# EAGLE board unoedge_conectoresad724 (EAGLE 6.5.0)
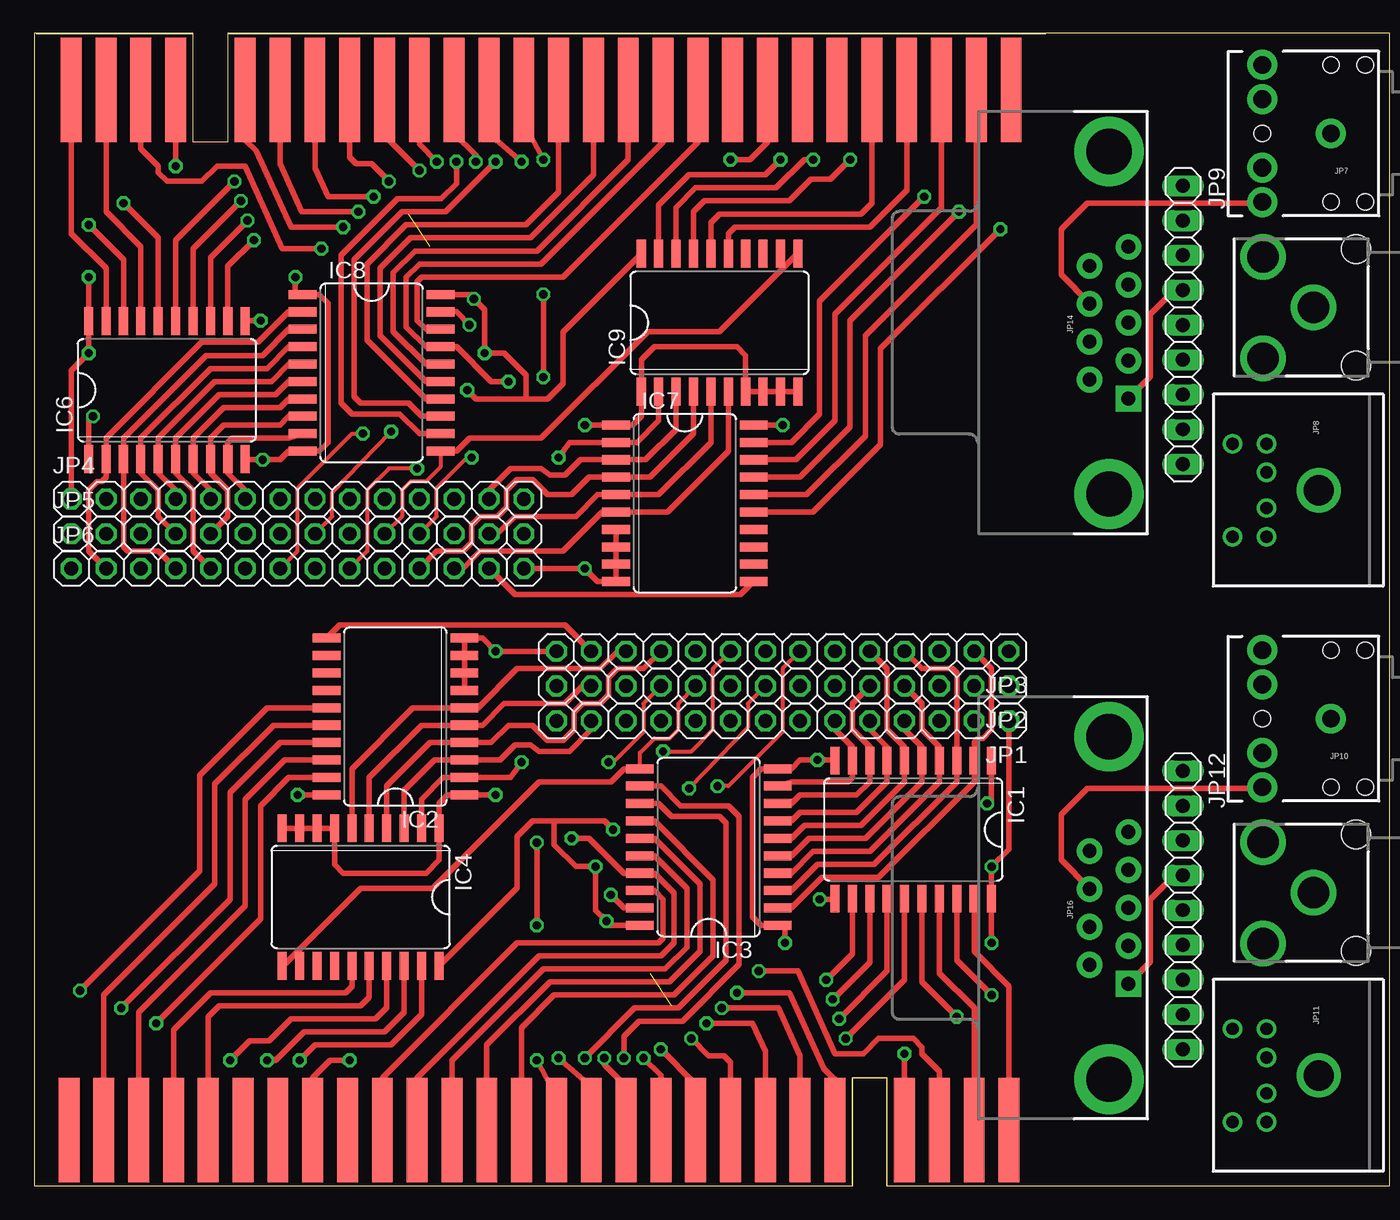
[diagram p0: board, top side]
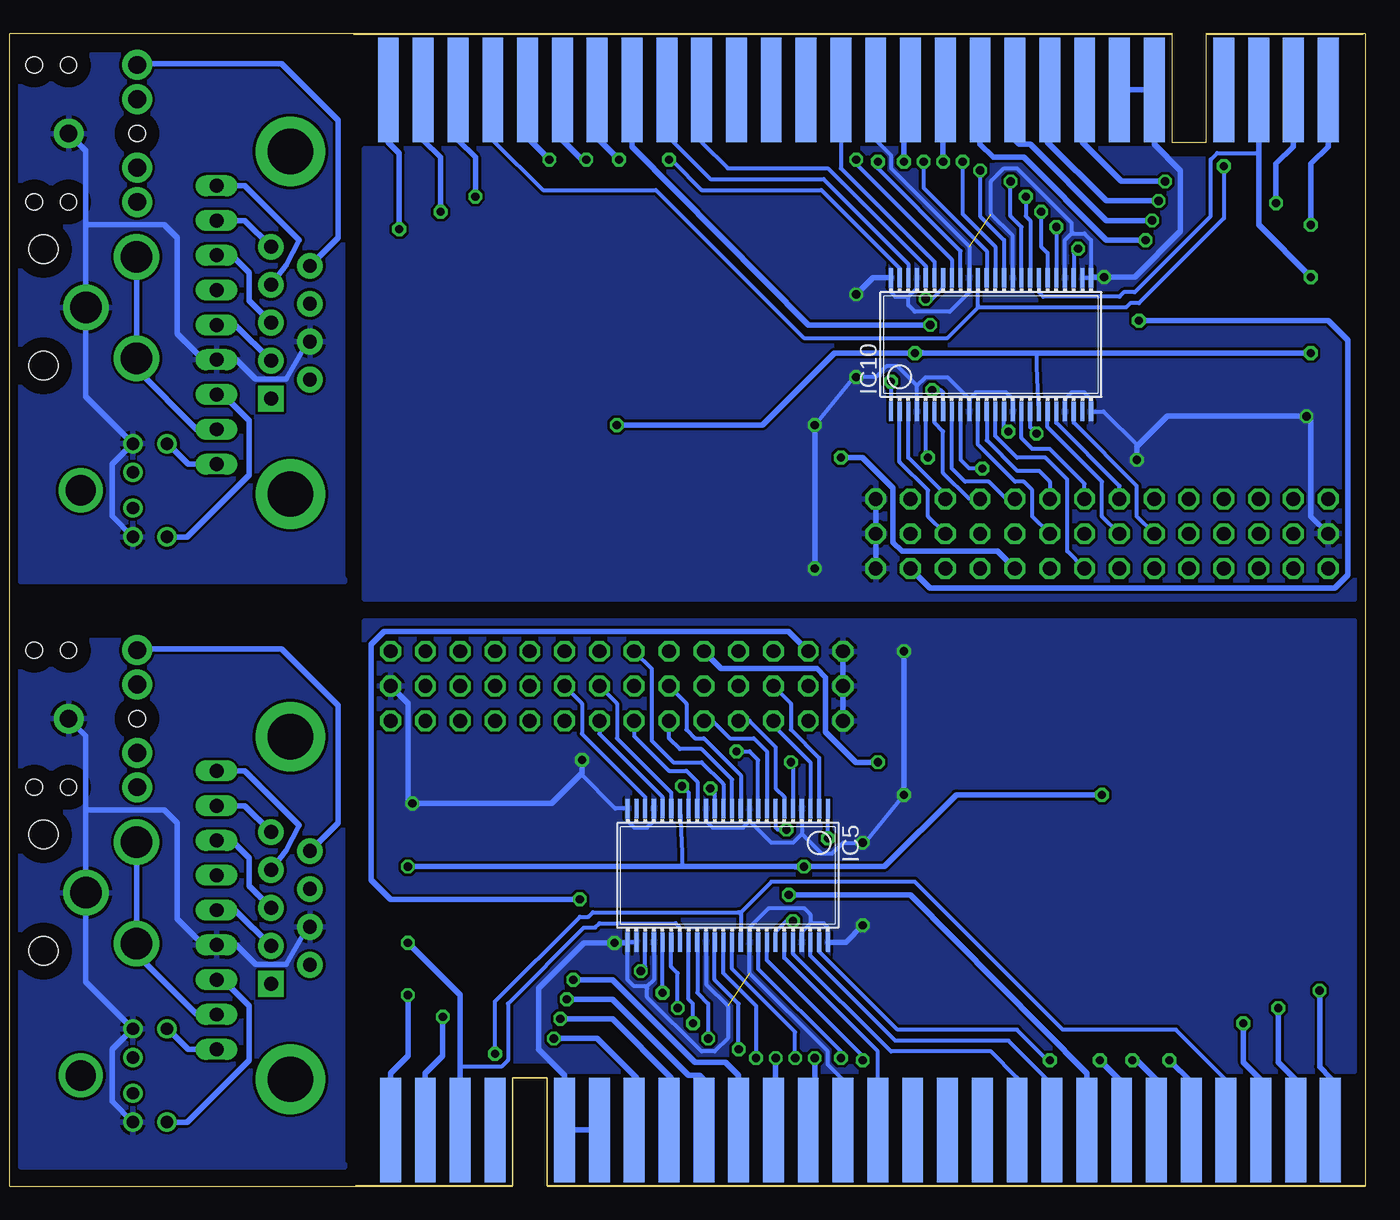
[diagram p1: board, bottom side, seen from below]

Size 73.82 x 84.01 mm. Coordinates in mm from the lower left corner, seen from the top.
Copper layers (1*16): Top 0.035mm / dielectric 1.5mm / Bottom 0.035mm
Design rules "default": minimum track width 10mil, minimum drill 24mil, track to track 8mil, track to pad 8mil, pad to pad 8mil, via to via 8mil, smd to smd 8mil, copper to edge 40mil, drill to drill 8mil, minimum pad ring 10mil, minimum via ring 8mil, stop-mask expansion 4mil, vias tented up to drill 0mil, thermal gap 10mil
Milling: 12 lines

## Footprints (pad centres in the part's own frame; a part is rotated, then mirrored left to right if it is on the bottom)
SO20W = smd 0.66 x 2.032: 1 -5.715,-5.029; 2 -4.445,-5.029; 3 -3.175,-5.029; 4 -1.905,-5.029; 5 -0.635,-5.029; 6 0.635,-5.029; 7 1.905,-5.029; 8 3.175,-5.029; 9 4.445,-5.029; 10 5.715,-5.029; 11 5.715,5.029; 12 4.445,5.029; 13 3.175,5.029; 14 1.905,5.029; 15 0.635,5.029; 16 -0.635,5.029; 17 -1.905,5.029; 18 -3.175,5.029; 19 -4.445,5.029; 20 -5.715,5.029
SSOP48DL = smd 0.305 x 1.422: 1 -6.985,-4.877; 2 -6.35,-4.877; 3 -5.715,-4.877; 4 -5.08,-4.877; 5 -4.445,-4.877; 6 -3.81,-4.877; 7 -3.175,-4.877; 8 -2.54,-4.877; 9 -1.905,-4.877; 10 -1.27,-4.877; 11 -0.635,-4.877; 12 0,-4.877; 13 0.635,-4.877; 14 1.27,-4.877; 15 1.905,-4.877; 16 2.54,-4.877; 17 3.175,-4.877; 18 3.81,-4.877; 19 4.445,-4.877; 20 5.08,-4.877; 21 5.715,-4.877; 22 6.35,-4.877; 23 6.985,-4.877; 24 7.62,-4.877; 25 7.62,4.877; 26 6.985,4.877; 27 6.35,4.877; 28 5.715,4.877; 29 5.08,4.877; 30 4.445,4.877; 31 3.81,4.877; 32 3.175,4.877; 33 2.54,4.877; 34 1.905,4.877; 35 1.27,4.877; 36 0.635,4.877; 37 0,4.877; 38 -0.635,4.877; 39 -1.27,4.877; 40 -1.905,4.877; 41 -2.54,4.877; 42 -3.175,4.877; 43 -3.81,4.877; 44 -4.445,4.877; 45 -5.08,4.877; 46 -5.715,4.877; 47 -6.35,4.877; 48 -6.985,4.877
1X14 = drill 1.016 octagon: 1 -16.51,0; 2 -13.97,0; 3 -11.43,0; 4 -8.89,0; 5 -6.35,0; 6 -3.81,0; 7 -1.27,0; 8 1.27,0; 9 3.81,0; 10 6.35,0; 11 8.89,0; 12 11.43,0; 13 13.97,0; 14 16.51,0
AUDIO-JACK = drill 1.3 pad 2.184: RING 5,5; RSH 5,2.5; SLEEVE 0,0; TIP 5,-5; TSH 5,-2.5 | hole 1.2: 0,5; -2.5,5; -2.5,-5; 0,-5; 5,0
MINI-DIN6 = drill 0.9: 1 -1.3,-8.5; 2 1.3,-8.5; 3 -3.4,-8.5; 4 3.4,-8.5; 5 -3.4,-11; 6 3.4,-11 | drill 2.2: P$1 0,-4.7
1X09 = drill 1.016 long: 1 -10.16,0; 2 -7.62,0; 3 -5.08,0; 4 -2.54,0; 5 0,0; 6 2.54,0; 7 5.08,0; 8 7.62,0; 9 10.16,0
RCA = drill 2.3: PIN 3.7,3.7; SHELL 0,0; SWITCH 3.7,-3.7 | hole 2.1: -3.1,4.25; -3.1,-4.25
DB9_MALE = drill 1.016 pad 1.88: 1 5.54,-1.42; 2 2.77,-1.42; 3 0,-1.42; 4 -2.77,-1.42; 6 4.15,1.42; 7 1.38,1.42; 8 -1.38,1.42; 9 -4.15,1.42 | drill 1.016 pad 1.88 square: 5 -5.54,-1.42 | drill 3.302 pad 5.08: G1 -12.5,0; G2 12.5,0
CONECTOR_LADO_SPECTRUM = smd 7.62 x 1.524: P$1 2.54,2.54; P$2 2.54,0; P$3 2.54,-2.54; P$4 2.54,-5.08; P$5 2.54,-10.16; P$6 2.54,-12.7; P$7 2.54,-15.24; P$8 2.54,-17.78; P$9 2.54,-20.32; P$10 2.54,-22.86; P$11 2.54,-25.4; P$12 2.54,-27.94; P$13 2.54,-30.48; P$14 2.54,-33.02; P$15 2.54,-35.56; P$16 2.54,-38.1; P$17 2.54,-40.64; P$18 2.54,-43.18; P$19 2.54,-45.72; P$20 2.54,-48.26; P$21 2.54,-50.8; P$22 2.54,-53.34; P$23 2.54,-55.88; P$24 2.54,-58.42; P$25 2.54,-60.96; P$26 2.54,-63.5; P$27 2.54,-66.04 | smd 7.62 x 1.524 bottom: P$28 2.54,2.54; P$29 2.54,0; P$30 2.54,-2.54; P$31 2.54,-5.08; P$32 2.54,-10.16; P$33 2.54,-12.7; P$34 2.54,-15.24; P$35 2.54,-17.78; P$36 2.54,-20.32; P$37 2.54,-22.86; P$38 2.54,-25.4; P$39 2.54,-27.94; P$40 2.54,-30.48; P$41 2.54,-33.02; P$42 2.54,-35.56; P$43 2.54,-38.1; P$44 2.54,-40.64; P$45 2.54,-43.18; P$46 2.54,-45.72; P$47 2.54,-48.26; P$48 2.54,-50.8; P$49 2.54,-53.34; P$50 2.54,-55.88; P$51 2.54,-58.42; P$52 2.54,-60.96; P$53 2.54,-63.5; P$54 2.54,-66.04

## Placement (x,y rotation side)
IC1  74HC574D  [SO20W]  64.14,25.97 180 top
IC2  74HC574D  [SO20W]  26.35,34.23 90 top
IC3  74HC574D  [SO20W]  49.21,24.7 90 top
IC4  74HC574D  [SO20W]  23.81,21.05 180 top
IC5  74AC16245  [SSOP48DL]  46.2,22.64 180 bottom
IC6  74HC574D  [SO20W]  9.68,58.04 0 top
IC7  74HC574D  [SO20W]  47.47,49.78 270 top
IC8  74HC574D  [SO20W]  24.61,59.31 270 top
IC9  74HC574D  [SO20W]  50.01,62.96 0 top
IC10  74AC16245  [SSOP48DL]  27.62,61.37 0 bottom
JP1  fila1  [1X14]  54.61,33.91 180 top
JP2  fila2  [1X14]  54.61,36.45 180 top
JP3  fila3  [1X14]  54.61,38.99 180 top
JP4  fila1  [1X14]  19.21,50.1 0 top
JP5  fila2  [1X14]  19.21,47.56 0 top
JP6  fila3  [1X14]  19.21,45.02 0 top
JP7  [AUDIO-JACK]  94.61,76.77 180 top  (outside the outline)
JP8  MINI-DIN6PTH  [MINI-DIN6]  98.42,50.74 270 top  (outside the outline)
JP9  [1X09]  83.82,62.8 270 top  (outside the outline)
JP10  [AUDIO-JACK]  94.61,34.07 180 top  (outside the outline)
JP11  MINI-DIN6PTH  [MINI-DIN6]  98.42,8.03 270 top  (outside the outline)
JP12  [1X09]  83.82,20.1 270 top  (outside the outline)
JP13  RCA  [RCA]  93.34,64.07 180 top  (outside the outline)
JP14  [DB9_MALE]  78.42,62.96 90 top  (outside the outline)
JP15  RCA  [RCA]  93.34,21.37 180 top  (outside the outline)
JP16  [DB9_MALE]  78.42,20.26 90 top  (outside the outline)
U$1  CONECTOR_EDGE_LADO_SPECTRUM  [CONECTOR_LADO_SPECTRUM]  5.24,77.41 90 top
U$2  CONECTOR_EDGE_LADO_SPECTRUM  [CONECTOR_LADO_SPECTRUM]  68.58,6.6 270 top

## Library data of the parts
IC1-IC4 IC6-IC9 = 74xx-eu
IC5 IC10 = 74ac-logic
JP1-JP6 JP9 JP12 = pinhead
JP7 JP8 JP10 JP11 JP13-JP16 = SparkFun-Connectors
U$1 U$2 = zx_bus_connector_lado_spectrum

## Nets
+3.3V: JP3.1
+3.3V1: JP6.1
/BUSAK: IC2.19 U$2.P$52
/BUSAK1: IC7.19 U$1.P$52
/BUSRQ: IC5.44 U$2.P$45
/BUSRQ1: IC10.44 U$1.P$45
/HALT: IC3.14 U$2.P$14
/HALT1: IC8.14 U$1.P$14
/INT: IC5.40 U$2.P$12
/INT1: IC10.40 U$1.P$12
/IORQ: IC3.16 U$2.P$16
/IORQ1: IC8.16 U$1.P$16
/IORQULA: IC3.13 U$2.P$39
/IORQULA1: IC8.13 U$1.P$39
/M1: IC4.16 U$2.P$23
/M2: IC9.16 U$1.P$23
/MREQ: IC3.15 U$2.P$15
/MREQ1: IC8.15 U$1.P$15
/NMI: IC5.41 U$2.P$13
/NMI1: IC10.41 U$1.P$13
/RD: IC3.17 IC5.1 U$2.P$17
/RD1: IC8.17 IC10.1 U$1.P$17
/RESET: IC5.46 U$2.P$46
/RESET1: IC10.46 U$1.P$46
/RFSH: IC4.15 U$2.P$24
/RFSH1: IC9.15 U$1.P$24
/WAIT: IC5.47 U$2.P$20
/WAIT1: IC10.47 U$1.P$20
/WR: IC3.18 U$2.P$18
/WR1: IC8.18 U$1.P$18
A0: IC1.14 U$2.P$35
A1: IC1.13 U$2.P$36
A2: IC1.12 U$2.P$37
A3: IC3.12 U$2.P$38
A4: IC4.17 U$2.P$50
A5: IC4.18 U$2.P$49
A6: IC4.19 U$2.P$48
A7: IC3.19 U$2.P$47
A8: IC2.18 U$2.P$25
A9: IC2.17 U$2.P$53
A10: IC2.16 U$2.P$26
A11: IC2.15 U$2.P$54
A12: IC1.16 U$2.P$29
A13: IC1.17 U$2.P$2
A14: IC1.18 U$2.P$28
A15: IC1.19 U$2.P$1
A16: IC6.14 U$1.P$35
A17: IC6.13 U$1.P$36
A18: IC6.12 U$1.P$37
A19: IC8.12 U$1.P$38
A20: IC9.17 U$1.P$50
A21: IC9.18 U$1.P$49
A22: IC9.19 U$1.P$48
A23: IC8.19 U$1.P$47
A24: IC7.18 U$1.P$25
A25: IC7.17 U$1.P$53
A26: IC7.16 U$1.P$26
A27: IC7.15 U$1.P$54
A28: IC6.16 U$1.P$29
A29: IC6.17 U$1.P$2
A30: IC6.18 U$1.P$28
A31: IC6.19 U$1.P$1
CKEXT: IC1.15 U$2.P$34
CKEXT1: IC6.15 U$1.P$34
D0: IC5.29 U$2.P$5
D1: IC5.30 U$2.P$6
D2: IC5.32 U$2.P$7
D3: IC5.36 U$2.P$10
D4: IC5.37 U$2.P$11
D5: IC5.35 U$2.P$9
D6: IC5.33 U$2.P$8
D7: IC5.27 U$2.P$3
D8: IC10.27 U$1.P$3
D9: IC10.33 U$1.P$8
D10: IC10.29 U$1.P$5
D11: IC10.30 U$1.P$6
D12: IC10.32 U$1.P$7
D13: IC10.35 U$1.P$9
D14: IC10.36 U$1.P$10
D15: IC10.37 U$1.P$11
EXT1: IC6.5 IC8.5 JP4.4
EXT2: IC6.7 IC8.7 JP4.5
EXT3: IC1.2 IC3.2 JP3.2
EXT4: IC6.9 IC8.9 JP4.6
EXT5: IC10.20 JP4.7
EXT6: IC10.16 JP4.8
EXT7: IC1.5 IC3.5 JP1.4
EXT8: IC1.4 IC3.4 JP2.4
EXT9: IC1.3 IC3.3 JP3.4
EXT10: IC1.7 IC3.7 JP1.5
EXT11: IC1.8 IC3.8 JP2.5
EXT12: IC1.6 IC3.6 JP3.5
EXT13: IC1.9 IC3.9 JP1.6
EXT14: IC5.22 JP2.6
EXT15: JP3.6
EXT16: IC5.20 JP1.7
EXT17: IC5.19 JP2.7
EXT18: IC5.17 JP3.7
EXT19: IC5.16 JP1.8
EXT20: IC5.14 JP2.8
EXT21: IC5.13 JP3.8
EXT22: IC5.12 JP1.9
EXT23: IC5.11 JP2.9
EXT24: IC5.9 JP3.9
EXT25: IC5.8 JP1.10
EXT26: IC3.11 IC4.11 JP2.10
EXT27: IC2.2 IC4.2 JP3.10
EXT28: IC5.6 JP1.11
EXT29: IC5.5 JP2.11
EXT30: IC2.4 IC4.4 JP3.11
EXT31: IC5.3 JP1.12
EXT32: IC5.2 JP2.12
EXT33: IC2.6 IC4.6 JP3.12
EXT34: IC2.3 IC4.3 JP1.13
EXT35: IC2.5 IC4.5 JP2.13
EXT36: IC1.11 IC2.11 JP3.13
EXT37: IC10.12 JP4.9
EXT38: IC10.8 JP4.10
EXT39: IC10.6 JP4.11
EXT40: IC10.3 JP4.12
EXT41: IC7.3 IC9.3 JP4.13
EXT42: IC6.4 IC8.4 JP5.4
EXT43: IC6.8 IC8.8 JP5.5
EXT44: IC10.22 JP5.6
EXT45: IC10.19 JP5.7
EXT46: IC10.14 JP5.8
EXT47: IC10.11 JP5.9
EXT48: IC8.11 IC9.11 JP5.10
EXT49: IC10.2 JP5.12
EXT50: IC7.5 IC9.5 JP5.13
EXT51: IC7.2 IC9.2 JP6.10
EXT52: IC6.2 IC8.2 JP6.2
EXT53: IC6.3 IC8.3 JP6.4
EXT54: IC6.6 IC8.6 JP6.5
EXT55: JP6.6
EXT56: IC10.17 JP6.7
EXT57: IC10.13 JP6.8
EXT58: IC10.9 JP6.9
EXT59: IC6.11 IC7.11 JP6.13
EXT60: IC7.6 IC9.6 JP6.12
EXT61: IC10.5 JP5.11
EXT62: IC7.4 IC9.4 JP6.11
GND: IC1.1 IC1.10 IC2.1 IC2.7 IC2.8 IC2.9 IC2.10 IC3.1 IC3.10 IC4.1 IC4.7 IC4.8 IC4.9 IC4.10 IC5.4 IC5.10 IC5.15 IC5.21 IC5.24 IC5.25 IC5.26 IC5.28 IC5.34 IC5.39 IC5.45 IC5.48 JP1.14 JP2.1 JP2.14 JP3.14 U$2.P$32 U$2.P$33 U$2.P$40
GND1: IC6.1 IC6.10 IC7.1 IC7.7 IC7.8 IC7.9 IC7.10 IC8.1 IC8.10 IC9.1 IC9.7 IC9.8 IC9.9 IC9.10 IC10.4 IC10.10 IC10.15 IC10.21 IC10.24 IC10.25 IC10.26 IC10.28 IC10.34 IC10.39 IC10.45 IC10.48 JP4.14 JP5.1 JP5.14 JP6.14 U$1.P$32 U$1.P$33 U$1.P$40
GND2: JP7.SLEEVE JP8.3 JP8.4 JP9.6 JP13.SHELL JP14.8
GND3: JP10.SLEEVE JP11.3 JP11.4 JP12.6 JP15.SHELL JP16.8
N$1: JP9.2 JP14.1
N$2: JP9.1 JP14.2
N$3: JP9.3 JP14.3
N$4: JP9.5 JP14.4
N$5: JP9.4 JP14.5
N$6: JP7.TIP JP14.6
N$7: JP7.RING JP14.7
N$8: JP12.2 JP16.1
N$9: JP8.5 JP9.9
N$10: JP9.8 JP13.PIN JP13.SWITCH
N$11: JP8.6 JP9.7
N$12: JP12.1 JP16.2
N$13: JP12.3 JP16.3
N$14: JP12.5 JP16.4
N$15: JP12.4 JP16.5
N$16: JP10.TIP JP16.6
N$17: JP10.RING JP16.7
N$18: JP12.8 JP15.PIN JP15.SWITCH
N$19: JP11.5 JP12.9
N$20: JP11.6 JP12.7
ROM1: IC5.38 U$2.P$4 U$2.P$51
ROM2: IC5.43 U$2.P$41
ROM3: IC10.43 U$1.P$41
ROM4: IC10.38 U$1.P$4 U$1.P$51
VCC: IC1.20 IC2.20 IC3.20 IC4.20 IC5.7 IC5.18 IC5.31 IC5.42 JP1.1 U$2.P$30
VCC1: IC6.20 IC7.20 IC8.20 IC9.20 IC10.7 IC10.18 IC10.31 IC10.42 JP4.1 U$1.P$30

## Tracks (layer width: path | path; a pad name or v marks a point on that pad's centre or on a via)
/BUSAK  (via drill 0.6)
  Top 0.406: IC2.19 18.57,29.78 16.51,27.72 16.51,19.46 v8.89,11.84
  Bottom 0.406: U$2.P$52 7.62,7.72 8.89,8.99 v8.89,11.84
/BUSAK1  (via drill 0.6)
  Top 0.406: IC7.19 55.24,54.23 57.31,56.29 57.31,64.55 v64.93,72.17
  Bottom 0.406: U$1.P$52 66.2,76.3 64.93,75.03 v64.93,72.17
/BUSRQ
  Bottom 0.305: U$2.P$45 25.4,7.87 27.3,9.78 34.61,9.78 41.75,16.92 IC5.44
/BUSRQ1
  Bottom 0.305: U$1.P$45 48.42,76.14 46.51,74.23 39.21,74.23 32.07,67.09 IC10.44
/HALT
  Top 0.406: IC3.14 45.24,26.61 49.53,22.32 49.53,16.76 46.67,13.91 37.94,13.91 35.56,11.53 U$2.P$14
/HALT1
  Top 0.406: IC8.14 28.57,57.4 24.29,61.69 24.29,67.25 27.15,70.1 35.88,70.1 38.26,72.49 U$1.P$14
/INT  (via drill 0.6)
  Top 0.406: v38.26,9.3 40.64,7.24 U$2.P$12
  Bottom 0.305: IC5.40 44.29,15.81 38.26,9.78 v38.26,9.3
/INT1  (via drill 0.6)
  Top 0.406: v35.56,74.71 33.18,76.77 U$1.P$12
  Bottom 0.305: IC10.40 29.53,68.2 35.56,74.23 v35.56,74.71
/IORQ
  Top 0.406: IC3.16 45.24,24.07 47.62,21.69 47.62,17.4 46.04,15.81 37.15,15.81 30.48,9.14 U$2.P$16
/IORQ1
  Top 0.406: IC8.16 28.57,59.94 26.19,62.33 26.19,66.61 27.78,68.2 36.67,68.2 43.34,74.87 U$1.P$16
/IORQULA  (via drill 0.6)
  Top 0.406: IC3.13 45.56,27.88 46.51,26.92 50.01,26.92 50.48,26.45 50.48,16.45 46.99,12.95 43.81,12.95 v40.16,9.3
  Bottom 0.406: v40.16,9.3 40.16,4.54 U$2.P$39
/IORQULA1  (via drill 0.6)
  Top 0.406: IC8.13 28.26,56.13 27.3,57.09 23.81,57.09 23.34,57.56 23.34,67.56 26.83,71.06 30,71.06 v33.66,74.71
  Bottom 0.406: v33.66,74.71 33.66,79.47 U$1.P$39
/M1
  Top 0.406: U$2.P$23 12.7,12.32 13.49,13.11 23.81,13.11 24.45,13.75 IC4.16
/M2
  Top 0.406: U$1.P$23 61.12,71.69 60.33,70.9 50.01,70.9 49.37,70.26 IC9.16
/MREQ
  Top 0.406: IC3.15 45.24,25.34 48.58,22 48.58,17.08 46.35,14.86 37.62,14.86 33.02,10.26 U$2.P$15
/MREQ1
  Top 0.406: IC8.15 28.57,58.67 25.24,62.01 25.24,66.93 27.46,69.15 36.2,69.15 40.8,73.76 U$1.P$15
/NMI  (via drill 0.6)
  Top 0.406: v36.67,9.14 38.1,6.45 U$2.P$13
  Bottom 0.305: v36.67,9.14 36.67,9.46 43.66,16.45 IC5.41
/NMI1  (via drill 0.6)
  Top 0.406: v37.15,74.87 35.72,77.57 U$1.P$13
  Bottom 0.305: v37.15,74.87 37.15,74.55 30.16,67.56 IC10.41
/RD  (via drill 0.6)
  Top 0.406: U$2.P$17 27.94,7.87 36.83,16.76 45.72,16.76 46.67,17.72 46.67,21.37 45.24,22.8 IC3.17 43.02,22.8 40.48,25.34 v39.21,25.34
  Bottom 0.305: v39.21,25.34 IC5.1
/RD1  (via drill 0.6)
  Top 0.406: U$1.P$17 45.88,76.14 36.99,67.25 28.1,67.25 27.15,66.29 27.15,62.64 28.57,61.21 IC8.17 30.8,61.21 33.34,58.67 v34.61,58.67
  Bottom 0.305: v34.61,58.67 IC10.1
/RESET
  Bottom 0.305: U$2.P$46 22.86,7.4 26.04,10.57 34.29,10.57 40.48,16.76 IC5.46
/RESET1
  Bottom 0.305: U$1.P$46 50.96,76.61 47.78,73.44 39.53,73.44 33.34,67.25 IC10.46
/RFSH
  Top 0.406: U$2.P$24 10.16,11.37 12.86,14.07 22.7,14.07 23.18,14.54 IC4.15
/RFSH1
  Top 0.406: U$1.P$24 63.66,72.64 60.96,69.95 51.12,69.95 50.64,69.47 IC9.15
/WAIT  (via drill 0.6)
  Top 0.406: U$2.P$20 20.32,7.87 21.59,9.14 v23.02,9.14
  Bottom 0.305: v23.02,9.14 23.34,9.3 25.4,11.37 34.13,11.37 39.85,17.08 IC5.47
/WAIT1  (via drill 0.6)
  Top 0.406: U$1.P$20 53.5,76.14 52.23,74.87 v50.8,74.87
  Bottom 0.305: v50.8,74.87 50.48,74.71 48.42,72.64 39.69,72.64 33.97,66.93 IC10.47
/WR
  Top 0.406: IC3.18 45.24,21.53 45.88,20.89 45.88,18.03 45.56,17.72 35.24,17.72 25.4,7.87 U$2.P$18
/WR1
  Top 0.406: IC8.18 28.57,62.48 27.94,63.12 27.94,65.98 28.26,66.29 38.58,66.29 48.42,76.14 U$1.P$18
A0  (via drill 0.6)
  Top 0.406: IC1.14 62.23,15.65 v58.74,12.16
  Bottom 0.406: U$2.P$35 50.64,4.22 50.64,7.87 54.93,12.16 v58.74,12.16
A1  (via drill 0.6)
  Top 0.406: IC1.13 60.96,16.29 v58.26,13.59
  Bottom 0.406: U$2.P$36 48.1,4.22 48.1,7.56 48.58,8.03 49.37,8.03 54.93,13.59 v58.26,13.59
A2  (via drill 0.6)
  Top 0.406: IC1.12 59.69,16.92 v57.78,15.02
  Bottom 0.406: U$2.P$37 45.72,8.03 46.67,8.99 48.9,8.99 54.93,15.02 v57.78,15.02
A3  (via drill 0.6)
  Top 0.406: IC3.12 45.72,29.15 47.15,27.72 50.64,27.72 51.44,26.92 51.44,16.13 47.31,12 44.13,12 43.02,10.89 v43.02,9.3
  Bottom 0.406: v43.02,9.3 43.02,4.22 U$2.P$38
A4  (via drill 0.6)
  Top 0.406: IC4.17 25.72,12.95 24.92,12.16 18.73,12.16 17.14,10.57 15.72,10.57 v14.29,9.14
  Bottom 0.406: v14.29,9.14 12.7,7.56 U$2.P$50
A5  (via drill 0.6)
  Top 0.406: IC4.18 26.99,12.64 25.56,11.21 19.68,11.21 17.62,9.14 v16.99,9.14
  Bottom 0.406: v16.99,9.14 16.67,9.14 15.24,7.72 U$2.P$49
A6  (via drill 0.6)
  Top 0.406: IC4.19 28.26,12.48 26.04,10.26 20.48,10.26 v19.37,9.14
  Bottom 0.406: v19.37,9.14 17.78,7.56 U$2.P$48
A7  (via drill 0.6)
  Top 0.406: IC3.19 43.02,20.26 v42.07,21.21
  Bottom 0.406: v42.07,21.21 33.18,21.21 20.32,8.19 U$2.P$47
A8
  Top 0.406: IC2.18 18.26,31.05 15.4,28.19 15.4,20.42 7.62,12.64 U$2.P$25
A9  (via drill 0.6)
  Top 0.406: IC2.17 17.94,32.32 14.29,28.67 14.29,20.89 v6.35,12.95
  Bottom 0.406: v6.35,12.95 6.35,8.99 5.08,7.72 U$2.P$53
A10
  Top 0.406: IC2.16 17.46,33.59 13.18,29.31 13.18,22 5.08,13.91 U$2.P$26
A11  (via drill 0.6)
  Top 0.406: IC2.15 16.99,34.86 12.06,29.94 12.06,22.96 v3.33,14.22
  Bottom 0.406: v3.33,14.22 3.33,8.67 2.54,7.87 U$2.P$54
A12  (via drill 0.6)
  Top 0.406: IC1.16 64.77,14.86 v67.31,12.32
  Bottom 0.406: v67.31,12.32 67.31,9.46 68.58,8.19 U$2.P$29
A13
  Top 0.406: IC1.17 66.04,15.49 68.58,12.95 U$2.P$2
A14  (via drill 0.6)
  Top 0.406: IC1.18 67.31,16.45 v69.85,13.91
  Bottom 0.406: v69.85,13.91 69.85,9.46 71.12,8.19 U$2.P$28
A15
  Top 0.406: IC1.19 68.58,17.08 71.12,14.54 U$2.P$1
A16  (via drill 0.6)
  Top 0.406: IC6.14 11.59,68.36 v15.08,71.85
  Bottom 0.406: U$1.P$35 23.18,79.79 23.18,76.14 18.89,71.85 v15.08,71.85
A17  (via drill 0.6)
  Top 0.406: IC6.13 12.86,67.72 v15.56,70.42
  Bottom 0.406: U$1.P$36 25.72,79.79 25.72,76.45 25.24,75.98 24.45,75.98 18.89,70.42 v15.56,70.42
A18  (via drill 0.6)
  Top 0.406: IC6.12 14.13,67.09 v16.03,68.99
  Bottom 0.406: U$1.P$37 28.1,75.98 27.15,75.03 24.92,75.03 18.89,68.99 v16.03,68.99
A19  (via drill 0.6)
  Top 0.406: IC8.12 28.1,54.86 26.67,56.29 23.18,56.29 22.38,57.09 22.38,67.88 26.51,72.01 29.69,72.01 30.8,73.12 v30.8,74.71
  Bottom 0.406: v30.8,74.71 30.8,79.79 U$1.P$38
A20  (via drill 0.6)
  Top 0.406: IC9.17 48.1,71.06 48.9,71.85 55.09,71.85 56.67,73.44 58.1,73.44 v59.53,74.87
  Bottom 0.406: v59.53,74.87 61.12,76.45 U$1.P$50
A21  (via drill 0.6)
  Top 0.406: IC9.18 46.83,71.37 48.26,72.8 54.13,72.8 56.2,74.87 v56.83,74.87
  Bottom 0.406: v56.83,74.87 57.15,74.87 58.58,76.3 U$1.P$49
A22  (via drill 0.6)
  Top 0.406: IC9.19 45.56,71.53 47.78,73.76 53.34,73.76 v54.45,74.87
  Bottom 0.406: v54.45,74.87 56.04,76.45 U$1.P$48
A23  (via drill 0.6)
  Top 0.406: IC8.19 30.8,63.75 v31.75,62.8
  Bottom 0.406: v31.75,62.8 40.64,62.8 53.5,75.82 U$1.P$47
A24
  Top 0.406: IC7.18 55.56,52.96 58.42,55.82 58.42,63.6 66.2,71.37 U$1.P$25
A25  (via drill 0.6)
  Top 0.406: IC7.17 55.88,51.69 59.53,55.34 59.53,63.12 v67.47,71.06
  Bottom 0.406: v67.47,71.06 67.47,75.03 68.74,76.3 U$1.P$53
A26
  Top 0.406: IC7.16 56.36,50.42 60.64,54.71 60.64,62.01 68.74,70.1 U$1.P$26
A27  (via drill 0.6)
  Top 0.406: IC7.15 56.83,49.15 61.75,54.07 61.75,61.06 v70.48,69.79
  Bottom 0.406: v70.48,69.79 70.48,75.34 71.28,76.14 U$1.P$54
A28  (via drill 0.6)
  Top 0.406: IC6.16 9.05,69.15 v6.51,71.69
  Bottom 0.406: v6.51,71.69 6.51,74.55 5.24,75.82 U$1.P$29
A29
  Top 0.406: IC6.17 7.78,68.52 5.24,71.06 U$1.P$2
A30  (via drill 0.6)
  Top 0.406: IC6.18 6.51,67.56 v3.97,70.1
  Bottom 0.406: v3.97,70.1 3.97,74.55 2.7,75.82 U$1.P$28
A31
  Top 0.406: IC6.19 5.24,66.93 2.7,69.47 U$1.P$1
CKEXT  (via drill 0.6)
  Top 0.406: IC1.15 63.5,15.02 v59.21,10.73
  Bottom 0.406: v59.21,10.73 56.04,10.73 53.18,7.87 53.18,4.22 U$2.P$34
CKEXT1  (via drill 0.6)
  Top 0.406: IC6.15 10.32,68.99 v14.61,73.28
  Bottom 0.406: v14.61,73.28 17.78,73.28 20.64,76.14 20.64,79.79 U$1.P$34
D0  (via drill 0.6)
  Top 0.406: U$2.P$5 58.42,7.72 57.63,8.51 55.09,14.07 v51.28,14.07
  Bottom 0.305: v51.28,14.07 IC5.29
D1  (via drill 0.6)
  Top 0.406: U$2.P$6 55.88,9.46 54.29,12.95 v50.16,12.95
  Bottom 0.305: v50.16,12.95 50.16,15.49 50.64,15.97 IC5.30
D2  (via drill 0.6)
  Top 0.406: U$2.P$7 53.34,9.78 52.39,11.84 v49.05,11.84
  Bottom 0.305: v49.05,11.84 49.05,13.27 49.37,13.59 IC5.32
D3  (via drill 0.6)
  Top 0.406: U$2.P$10 45.72,8.03 v44.45,9.3
  Bottom 0.305: IC5.36 46.83,15.49 44.45,13.11 v44.45,9.3
D4  (via drill 0.6)
  Top 0.406: U$2.P$11 43.18,7.24 41.59,8.83 v41.59,9.3
  Bottom 0.305: v41.59,9.3 41.59,11.21 46.2,15.81 IC5.37
D5  (via drill 0.6)
  Top 0.406: U$2.P$9 48.26,7.4 v45.72,9.94
  Bottom 0.305: v45.72,9.94 45.72,13.27 47.47,15.02 IC5.35
D6  (via drill 0.6)
  Top 0.406: U$2.P$8 50.8,8.99 50.32,9.46 49.21,9.46 v47.94,10.73
  Bottom 0.305: IC5.33 48.74,14.07 47.94,13.27 v47.94,10.73
D7  (via drill 0.6)
  Top 0.406: U$2.P$3 66.04,8.35 64.77,9.62 64.77,10.1 64.14,10.73 61.59,10.73 60.48,9.62 58.42,9.62 55.72,15.65 v52.86,15.65
  Bottom 0.305: v52.86,15.65 52.55,15.97 IC5.27
D8  (via drill 0.6)
  Top 0.406: U$1.P$3 7.78,75.66 9.05,74.39 9.05,73.91 9.68,73.28 12.22,73.28 13.34,74.39 15.4,74.39 18.1,68.36 v20.95,68.36
  Bottom 0.305: v20.95,68.36 21.27,68.04 IC10.27
D9  (via drill 0.6)
  Top 0.406: U$1.P$8 23.02,75.03 23.5,74.55 24.61,74.55 v25.88,73.28
  Bottom 0.305: IC10.33 25.08,69.95 25.88,70.74 v25.88,73.28
D10  (via drill 0.6)
  Top 0.406: U$1.P$5 15.4,76.3 16.19,75.5 18.73,69.95 v22.54,69.95
  Bottom 0.305: v22.54,69.95 IC10.29
D11  (via drill 0.6)
  Top 0.406: U$1.P$6 17.94,74.55 19.53,71.06 v23.65,71.06
  Bottom 0.305: v23.65,71.06 23.65,68.52 23.18,68.04 IC10.30
D12  (via drill 0.6)
  Top 0.406: U$1.P$7 20.48,74.23 21.43,72.17 v24.77,72.17
  Bottom 0.305: v24.77,72.17 24.77,70.74 24.45,70.42 IC10.32
D13  (via drill 0.6)
  Top 0.406: U$1.P$9 25.56,76.61 v28.1,74.07
  Bottom 0.305: v28.1,74.07 28.1,70.74 26.35,68.99 IC10.35
D14  (via drill 0.6)
  Top 0.406: U$1.P$10 28.1,75.98 v29.37,74.71
  Bottom 0.305: IC10.36 26.99,68.52 29.37,70.9 v29.37,74.71
D15  (via drill 0.6)
  Top 0.406: U$1.P$11 30.64,76.77 32.23,75.18 v32.23,74.71
  Bottom 0.305: v32.23,74.71 32.23,72.8 27.62,68.2 IC10.37
EXT1
  Top 0.406: JP4.4 10.32,50.74 9.05,52.01 IC6.5 9.05,54.55 13.18,58.67 17.3,58.67 18.57,59.94 IC8.5 20.16,59.94
EXT2
  Top 0.406: JP4.5 12.86,50.74 11.59,52.01 IC6.7 11.59,54.55 13.81,56.77 17.94,56.77 18.57,57.4 IC8.7
EXT3
  Top 0.406: JP3.2 69.85,37.72 69.85,33.27 69.22,32.64 68.9,32.64 68.58,32.32 IC1.2 68.58,29.46 61.59,22.48 57.47,22.48 55.24,20.26 IC3.2
EXT4
  Top 0.406: JP4.6 15.4,50.74 14.13,52.01 IC6.9 14.13,54.23 14.45,54.55 18.57,54.55 IC8.9
EXT5
  Bottom 0.305: JP4.7 17.94,51.05 22.54,55.66 IC10.20
EXT6
  Bottom 0.305: JP4.8 20.48,51.21 23.02,53.75 24.29,53.75 25.08,54.55 IC10.16
EXT7
  Top 0.406: JP1.4 63.5,33.27 64.77,32 IC1.5 64.77,29.46 60.64,25.34 56.52,25.34 55.24,24.07 IC3.5 53.66,24.07
EXT8
  Top 0.406: JP2.4 64.77,35.18 64.77,33.27 66.04,32 IC1.4 66.04,29.46 60.96,24.38 56.83,24.38 55.24,22.8 IC3.4
EXT9
  Top 0.406: JP3.4 64.77,37.72 66.99,37.72 67.31,37.4 IC1.3 67.31,29.46 61.28,23.43 57.15,23.43 55.24,21.53 IC3.3
EXT10
  Top 0.406: JP1.5 60.96,33.27 62.23,32 IC1.7 62.23,29.46 60.01,27.24 55.88,27.24 55.24,26.61 IC3.7
EXT11
  Top 0.406: JP2.5 59.69,35.18 59.69,33.27 60.96,32 IC1.8 60.96,29.46 60.01,28.51 55.88,28.51 55.24,27.88 IC3.8
EXT12
  Top 0.406: JP3.5 62.23,37.72 62.23,33.27 63.5,32 IC1.6 63.5,29.46 60.33,26.29 56.2,26.29 55.24,25.34 IC3.6
EXT13
  Top 0.406: JP1.6 58.42,33.27 59.69,32 IC1.9 59.69,29.78 59.37,29.46 55.24,29.46 IC3.9
EXT14
  Bottom 0.305: JP2.6 57.15,35.18 57.15,32.96 52.55,28.35 IC5.22
EXT16
  Bottom 0.305: JP1.7 55.88,32.96 51.28,28.35 IC5.20
EXT17
  Bottom 0.305: JP2.7 54.61,35.18 54.61,32.64 50.64,28.67 IC5.19
EXT18  (via drill 0.6)
  Top 0.305: JP3.7 54.61,37.72 54.61,33.12 50.64,29.15 v49.85,29.15
  Bottom 0.305: v49.85,29.15 49.37,28.67 IC5.17
EXT19
  Bottom 0.305: JP1.8 53.34,32.8 50.8,30.26 49.53,30.26 48.74,29.46 IC5.16
EXT20  (via drill 0.6)
  Top 0.305: JP2.8 52.07,35.18 52.07,33.43 v47.78,28.99
  Bottom 0.305: v47.78,28.99 47.47,28.83 IC5.14
EXT21
  Bottom 0.305: JP3.8 52.07,37.72 52.07,32.48 50.48,30.89 48.42,30.89 46.83,29.31 IC5.13
EXT22
  Bottom 0.305: IC5.12 46.2,29.62 48.42,31.85 50.01,31.85 50.8,32.64 JP1.9
EXT23
  Bottom 0.305: JP2.9 49.53,35.18 49.53,33.27 48.9,32.64 48.26,32.64 45.56,29.94 IC5.11
EXT24  (via drill 0.6)
  Top 0.305: v45.88,31.69 47.94,31.69 49.53,33.27 49.53,37.72 JP3.9
  Bottom 0.305: IC5.9 44.29,31.05 44.93,31.69 v45.88,31.69
EXT25
  Bottom 0.305: JP1.10 47.62,33.91 46.35,32.64 44.61,32.64 43.66,31.69 IC5.8
EXT26
  Top 0.305: IC3.11 44.18,31.58 45.24,32.64 46.35,32.64 46.99,33.27 46.99,35.18 JP2.10
  Top 0.406: IC3.11 43.02,30.42 42.07,29.46 36.83,29.46 29.05,21.69 23.81,21.69 18.1,15.97 IC4.11
EXT27  (via drill 0.6)
  Top 0.406: IC4.2 28.26,28.19 29.84,29.78 IC2.2 34.77,29.78 v35.56,30.89
  Bottom 0.406: v35.56,30.89 37.15,30.89 39.37,33.12 39.37,37.08 40.01,37.72 46.99,37.72 JP3.10
EXT28
  Bottom 0.305: JP1.11 44.93,33.91 43.02,32 43.02,28.99 42.39,28.35 IC5.6
EXT29  (via drill 0.6)
  Top 0.305: JP2.11 44.45,35.18 44.45,33.12 42.23,30.89 v41.91,30.89
  Bottom 0.305: v41.91,30.89 41.75,30.73 IC5.5
EXT30
  Top 0.406: IC4.4 25.72,29.15 28.89,32.32 IC2.4 33.34,32.32 34.61,33.59 36.35,33.59 37.47,32.48 38.58,32.48 39.37,33.27 39.37,34.54 40.01,35.18 41.27,35.18 41.91,35.81 41.91,37.08 42.55,37.72 44.45,37.72 JP3.11
EXT31
  Bottom 0.305: JP1.12 43.18,33.59 40.48,30.89 IC5.3
EXT32
  Bottom 0.305: JP2.12 41.91,35.18 41.91,33.27 39.85,31.21 IC5.2
EXT33
  Top 0.406: IC4.6 23.18,30.42 27.62,34.86 IC2.6 32.38,34.86 35.24,37.72 41.27,37.72 42.55,38.99 JP3.12
EXT34
  Top 0.406: IC4.3 26.99,28.83 29.21,31.05 IC2.3 33.97,31.05 35.08,32.16 36.2,32.16 36.83,31.69 39.05,31.69 40.64,33.27 JP1.13
EXT35
  Top 0.406: IC4.5 24.45,29.78 28.26,33.59 IC2.5 32.7,33.59 34.29,35.18 38.73,35.18 40.01,36.45 JP2.13
EXT36  (via drill 0.6)
  Top 0.406: JP3.13 38.73,40.89 22.28,40.89 IC2.11 | v57.31,20.89 58.37,20.89 IC1.11
  Bottom 0.406: JP3.13 42.07,40.42 71.6,40.42 72.55,39.47 72.55,22.32 71.12,20.89 v57.31,20.89
EXT37
  Bottom 0.305: IC10.12 27.62,54.39 25.4,52.17 23.81,52.17 23.02,51.37 JP4.9
EXT38
  Bottom 0.305: JP4.10 26.19,50.1 27.46,51.37 29.21,51.37 30.16,52.32 IC10.8
EXT39
  Bottom 0.305: JP4.11 28.89,50.1 30.8,52.01 30.8,55.02 31.43,55.66 IC10.6
EXT40
  Bottom 0.305: JP4.12 30.64,50.42 33.34,53.12 IC10.3
EXT41
  Top 0.406: IC9.3 46.83,55.18 44.61,52.96 IC7.3 39.85,52.96 38.73,51.85 37.62,51.85 36.99,52.32 34.77,52.32 33.18,50.74 JP4.13
EXT42
  Top 0.406: JP5.4 9.05,48.83 9.05,50.74 7.78,52.01 IC6.4 7.78,54.55 12.86,59.63 16.99,59.63 18.57,61.21 IC8.4
EXT43
  Top 0.406: JP5.5 14.13,48.83 14.13,50.74 12.86,52.01 IC6.8 12.86,54.55 13.81,55.5 17.94,55.5 18.57,56.13 IC8.8
EXT44
  Bottom 0.305: JP5.6 16.67,48.83 16.67,51.05 21.27,55.66 IC10.22
EXT45
  Bottom 0.305: JP5.7 19.21,48.83 19.21,51.37 23.18,55.34 IC10.19
EXT46  (via drill 0.6)
  Top 0.305: JP5.8 21.75,48.83 21.75,50.58 v26.04,55.02
  Bottom 0.305: v26.04,55.02 26.35,55.18 IC10.14
EXT47
  Bottom 0.305: JP5.9 24.29,48.83 24.29,50.74 24.92,51.37 25.56,51.37 28.26,54.07 IC10.11
EXT48
  Top 0.305: IC8.11 29.64,52.43 28.57,51.37 27.46,51.37 26.83,50.74 26.83,48.83 JP5.10
  Top 0.406: IC8.11 30.8,53.59 31.75,54.55 36.99,54.55 44.77,62.33 50.01,62.33 55.72,68.04 IC9.11
EXT49
  Bottom 0.305: JP5.12 31.91,48.83 31.91,50.74 33.97,52.8 IC10.2
EXT50
  Top 0.406: IC9.5 49.37,54.23 45.56,50.42 IC7.5 41.12,50.42 39.53,48.83 35.08,48.83 33.81,47.56 JP5.13
EXT51  (via drill 0.6)
  Top 0.406: IC9.2 45.56,55.82 43.97,54.23 IC7.2 39.05,54.23 v38.26,53.12
  Bottom 0.406: v38.26,53.12 36.67,53.12 34.45,50.9 34.45,46.93 33.81,46.29 26.83,46.29 JP6.10
EXT52
  Top 0.406: JP6.2 3.97,46.29 3.97,50.74 4.6,51.37 4.92,51.37 5.24,51.69 IC6.2 5.24,54.55 12.22,61.53 16.35,61.53 18.57,63.75 IC8.2
EXT53
  Top 0.406: JP6.4 9.05,46.29 6.83,46.29 6.51,46.61 IC6.3 6.51,54.55 12.54,60.58 16.67,60.58 18.57,62.48 IC8.3
EXT54
  Top 0.406: JP6.5 11.59,46.29 11.59,50.74 10.32,52.01 IC6.6 10.32,54.55 13.49,57.72 17.62,57.72 18.57,58.67 IC8.6
EXT56  (via drill 0.6)
  Top 0.305: JP6.7 19.21,46.29 19.21,50.9 23.18,54.86 v23.97,54.86
  Bottom 0.305: v23.97,54.86 24.45,55.34 IC10.17
EXT57
  Bottom 0.305: JP6.8 21.75,46.29 21.75,51.53 23.34,53.12 25.4,53.12 26.99,54.71 IC10.13
EXT58  (via drill 0.6)
  Top 0.305: v27.94,52.32 25.88,52.32 24.29,50.74 24.29,46.29 JP6.9
  Bottom 0.305: IC10.9 29.53,52.96 28.89,52.32 v27.94,52.32
EXT59  (via drill 0.6)
  Top 0.406: JP6.13 35.08,43.12 51.54,43.12 IC7.11 | v16.51,63.12 15.45,63.12 IC6.11
  Bottom 0.406: JP6.13 31.75,43.59 2.22,43.59 1.27,44.55 1.27,61.69 2.7,63.12 v16.51,63.12
EXT60
  Top 0.406: IC9.6 50.64,53.59 46.2,49.15 IC7.6 41.43,49.15 38.58,46.29 32.54,46.29 31.27,45.02 JP6.12
EXT61  (via drill 0.6)
  Top 0.305: JP5.11 29.37,48.83 29.37,50.9 31.59,53.12 v31.91,53.12
  Bottom 0.305: v31.91,53.12 32.07,53.28 IC10.5
EXT62
  Top 0.406: IC9.4 48.1,54.86 44.93,51.69 IC7.4 40.48,51.69 39.21,50.42 37.47,50.42 36.35,51.53 35.24,51.53 34.45,50.74 34.45,49.47 33.81,48.83 32.54,48.83 31.91,48.2 31.91,46.93 31.27,46.29 29.37,46.29 JP6.11
GND  (via drill 0.6)  (1 unrouted)
  Top 0.406: IC4.10 IC4.9 IC4.8 IC4.7 21.91,23.43 22.54,22.8 28.57,22.8 29.53,23.75 IC4.1 29.53,27.88 30.16,28.51 IC2.1 v33.66,28.51 | IC2.7 IC2.8 IC2.9 IC2.10 32.7,39.94 v33.66,38.99 JP3.14 | IC1.10 58.37,31.05 v57.15,31.05 55.88,31.05 55.24,30.42 IC3.10 53.02,30.42 52.39,29.78 52.39,19.62 53.02,18.99 IC3.1 54.77,18.99 v54.77,17.72 | v69.53,27.88 69.85,28.19 IC1.1 | v36.67,18.99 v36.67,25.02
  Bottom 0.305: U$2.P$40 38.1,7.72 39.21,8.83 39.21,9.78 44.93,15.49 IC5.39 44.93,18.83 43.5,20.26 40.96,20.26 40.48,19.78 40.48,19.15 | 57.23,30.02 54.72,27.51 IC5.24 53.82,26.61 53.34,26.13 52.39,26.13 51.91,26.61 IC5.21 | IC5.15 48.1,26.61 47.62,26.13 45.4,26.13 44.93,26.61 | 44.93,26.61 IC5.10 | 41.12,25.65 41.75,25.02 43.34,25.02 44.93,26.61 | IC5.4 41.12,25.65 | 41.12,25.65 39.69,24.23 38.89,24.23 38.1,25.02 36.83,25.02 | v36.67,25.02 36.51,25.02 v33.66,28.51 | IC5.48 39.21,18.83 39.53,19.15 40.48,19.15 | 40.48,19.15 41.12,18.51 IC5.45 | IC5.26 IC5.25 53.82,15.02 53.34,14.54 52.55,14.54 | IC5.28 51.91,15.02 52.39,14.54 52.55,14.54 | IC5.34 48.1,14.7 46.51,13.11 46.51,10.73 47.47,9.78 48.42,9.78 52.39,13.75 52.39,14.38 52.55,14.54
  Bottom 0.406: U$2.P$33 U$2.P$32 58.42,8.03 60.33,9.94 60.33,14.38 56.99,17.72 v54.77,17.72 53.86,17.72 IC5.25 | v57.15,31.05 57.15,30.1 57.23,30.02 59.37,27.88 v69.53,27.88 69.85,28.19 69.85,35.18 JP2.1 | v33.66,38.99 v33.66,28.51 | JP1.14 JP2.14 JP3.14 | IC5.48 37.9,17.76 v36.67,18.99 | v36.67,25.02 36.83,25.02
  pour Bottom: 73.03,8.35 0.79,8.35 0.79,41.21 73.03,41.21
GND1  (via drill 0.6)  (1 unrouted)
  Top 0.406: IC9.10 IC9.9 IC9.8 IC9.7 51.91,60.58 51.28,61.21 45.24,61.21 44.29,60.26 IC9.1 44.29,56.13 43.66,55.5 IC7.1 v40.16,55.5 | IC7.7 IC7.8 IC7.9 IC7.10 41.12,44.07 v40.16,45.02 JP6.14 | IC6.10 15.45,52.96 v16.67,52.96 17.94,52.96 18.57,53.59 IC8.10 20.8,53.59 21.43,54.23 21.43,64.39 20.8,65.02 IC8.1 19.05,65.02 v19.05,66.29 | v4.29,56.13 3.97,55.82 IC6.1 | v37.15,65.02 v37.15,58.99
  Bottom 0.305: U$1.P$40 35.72,76.3 34.61,75.18 34.61,74.23 28.89,68.52 IC10.39 28.89,65.18 30.32,63.75 32.86,63.75 33.34,64.23 33.34,64.87 | 16.59,53.99 19.09,56.5 IC10.24 20,57.4 20.48,57.88 21.43,57.88 21.91,57.4 IC10.21 | IC10.15 25.72,57.4 26.19,57.88 28.42,57.88 28.89,57.4 | 28.89,57.4 IC10.10 | 32.7,58.36 32.07,58.99 30.48,58.99 28.89,57.4 | IC10.4 32.7,58.36 | 32.7,58.36 34.13,59.79 34.92,59.79 35.72,58.99 36.99,58.99 | v37.15,58.99 37.31,58.99 v40.16,55.5 | IC10.48 34.61,65.18 34.29,64.87 33.34,64.87 | 33.34,64.87 32.7,65.5 IC10.45 | IC10.26 IC10.25 20,68.99 20.48,69.47 21.27,69.47 | IC10.28 21.91,68.99 21.43,69.47 21.27,69.47 | IC10.34 25.72,69.31 27.3,70.9 27.3,73.28 26.35,74.23 25.4,74.23 21.43,70.26 21.43,69.63 21.27,69.47
  Bottom 0.406: U$1.P$33 U$1.P$32 15.4,75.98 13.49,74.07 13.49,69.63 16.83,66.29 v19.05,66.29 19.96,66.29 IC10.25 | v16.67,52.96 16.67,53.91 16.59,53.99 14.45,56.13 v4.29,56.13 3.97,55.82 3.97,48.83 JP5.1 | v40.16,45.02 v40.16,55.5 | JP4.14 JP5.14 JP6.14 | IC10.48 35.92,66.25 v37.15,65.02 | v37.15,58.99 36.99,58.99
  pour Bottom: 0.79,75.66 73.03,75.66 73.03,42.8 0.79,42.8
GND2
  Bottom 0.406: JP7.SLEEVE 93.34,75.5 93.34,70.1 | 93.34,70.1 JP13.SHELL 93.34,57.56 JP8.3 89.94,54.14 91.44,52.64 91.44,48.85 JP8.4 | JP14.8 77.47,61.06 78.74,58.83 80.96,58.83 82.39,60.26 JP9.6 84.77,60.26 86.68,62.17 86.68,69.15 87.63,70.1 93.34,70.1
  pour Bottom: 74.61,44.23 74.61,82.49 98.11,82.49 98.11,44.07 74.45,44.07 74.45,44.23
GND3
  Bottom 0.406: JP10.SLEEVE 93.34,32.8 93.34,27.4 | 93.34,27.4 JP15.SHELL 93.34,14.85 JP11.3 89.94,11.43 91.44,9.94 91.44,6.15 JP11.4 | JP16.8 77.47,18.35 78.74,16.13 80.96,16.13 82.39,17.56 JP12.6 84.77,17.56 86.68,19.46 86.68,26.45 87.63,27.4 93.34,27.4
  pour Bottom: 74.61,1.52 74.61,39.78 98.11,39.78 98.11,1.37 74.45,1.37 74.45,1.52
N$1
  Bottom 0.406: JP9.2 81.76,70.42 JP14.1
N$2
  Bottom 0.406: JP9.1 81.76,72.96 77.79,68.99 78.74,67.15 JP14.2
N$3
  Bottom 0.406: JP9.3 82.71,67.88 81.44,66.61 81.44,64.56 JP14.3
N$4
  Bottom 0.406: JP9.5 82.45,62.8 JP14.4
N$5
  Top 0.406: JP9.4 83.19,65.34 81.44,63.6 81.44,59.02 JP14.5
N$6
  Bottom 0.406: JP7.TIP 89.53,81.85 79.06,81.85 74.93,77.72 74.93,69.18 JP14.6
N$7
  Top 0.406: JP7.RING 89.53,71.69 76.83,71.69 74.93,69.79 74.93,66.45 77,64.38 JP14.7
N$8
  Bottom 0.406: JP12.2 81.76,27.72 JP16.1
N$9
  Bottom 0.406: JP8.5 87.38,54.14 85.88,52.64 JP9.9
N$10
  Bottom 0.406: JP13.SWITCH JP13.PIN 89.64,59.58 85.25,55.18 JP9.8
N$11
  Bottom 0.406: JP8.6 85.95,47.34 81.44,51.85 81.44,55.82 83.34,57.72 JP9.7
N$12
  Bottom 0.406: JP12.1 81.76,30.26 77.79,26.29 78.74,24.45 JP16.2
N$13
  Bottom 0.406: JP12.3 82.71,25.18 81.44,23.91 81.44,21.85 JP16.3
N$14
  Bottom 0.406: JP12.5 82.45,20.1 JP16.4
N$15
  Top 0.406: JP12.4 83.19,22.64 81.44,20.89 81.44,16.31 JP16.5
N$16
  Bottom 0.406: JP10.TIP 89.53,39.15 79.06,39.15 74.93,35.02 74.93,26.48 JP16.6
N$17
  Top 0.406: JP10.RING 89.53,28.99 76.83,28.99 74.93,27.08 74.93,23.75 77,21.68 JP16.7
N$18
  Bottom 0.406: JP15.SWITCH JP15.PIN 89.64,16.87 85.25,12.48 JP12.8
N$19
  Bottom 0.406: JP11.5 87.38,11.43 85.88,9.94 JP12.9
N$20
  Bottom 0.406: JP11.6 85.95,4.63 81.44,9.14 81.44,13.11 83.34,15.02 JP12.7
ROM1  (via drill 0.6)
  Top 0.406: U$2.P$4 v63.5,9.62
  Bottom 0.305: U$2.P$51 10.16,7.72 13.81,11.37 22.07,11.37 32.86,22.16 43.34,22.16 45.56,19.94 45.56,19.78 | 45.56,19.78 IC5.38 | v63.5,9.62 63.5,13.43 57.31,19.62 56.67,19.62 56.36,19.94 45.72,19.94 45.56,19.78
ROM2
  Bottom 0.305: U$2.P$41 35.56,9.78 42.39,16.61 IC5.43
ROM3
  Bottom 0.305: U$1.P$41 38.26,74.23 31.43,67.41 IC10.43
ROM4  (via drill 0.6)
  Top 0.406: U$1.P$4 v10.32,74.39
  Bottom 0.305: U$1.P$51 63.66,76.3 60.01,72.64 51.75,72.64 40.96,61.85 30.48,61.85 28.26,64.07 28.26,64.23 | 28.26,64.23 IC10.38 | v10.32,74.39 10.32,70.58 16.51,64.39 17.14,64.39 17.46,64.07 28.1,64.07 28.26,64.23
VCC  (via drill 0.6)
  Top 0.406: v69.85,17.72 IC1.20 v69.85,23.27 71.12,24.54 JP1.1 | 21.27,28.46 IC2.20 v19.21,28.51 | IC3.20 42.07,18.99 v41.75,19.3 40.96,20.1 v40.96,23.27 39.53,23.27 37.94,24.86 37.94,26.61 | v42.23,25.97 41.59,26.61 37.94,26.61 | 37.94,26.61 36.35,26.61 35.24,25.5 35.24,21.74 IC4.20
  Bottom 0.305: v41.75,19.3 42.23,19.3 43.02,18.51 IC5.42 | IC5.7 43.02,26.13 42.86,25.97 v42.23,25.97 | IC5.31 50.01,18.83 50.32,19.15 55.88,19.15 56.2,18.83 56.99,18.83 62.55,13.27 62.55,9.14 63.02,8.67 65.88,8.67 66.04,8.83 | IC5.18 49.85,24.23 49.85,23.27
  Bottom 0.406: v69.85,17.72 66.04,13.91 66.04,8.83 U$2.P$30 | v40.96,23.27 41.75,23.27 40.96,23.11 v40.96,23.27 | v40.96,23.27 35.08,23.27 29.84,28.51 v19.21,28.51 | v40.96,23.27 49.85,23.27 v69.85,23.27
VCC1  (via drill 0.6)
  Top 0.406: v3.97,66.29 IC6.20 v3.97,60.74 2.7,59.47 JP4.1 | 52.55,55.55 IC7.20 v54.61,55.5 | IC8.20 31.75,65.02 v32.07,64.71 32.86,63.91 v32.86,60.74 34.29,60.74 35.88,59.15 35.88,57.4 | v31.59,58.04 32.23,57.4 35.88,57.4 | 35.88,57.4 37.47,57.4 38.58,58.52 38.58,62.27 IC9.20
  Bottom 0.305: v32.07,64.71 31.59,64.71 30.8,65.5 IC10.42 | IC10.7 30.8,57.88 30.96,58.04 v31.59,58.04 | IC10.31 23.81,65.18 23.5,64.87 17.94,64.87 17.62,65.18 16.83,65.18 11.27,70.74 11.27,74.87 10.79,75.34 7.94,75.34 7.78,75.18 | IC10.18 23.97,59.79 23.97,60.74
  Bottom 0.406: v3.97,66.29 7.78,70.1 7.78,75.18 U$1.P$30 | v32.86,60.74 32.07,60.74 32.86,60.9 v32.86,60.74 | v32.86,60.74 38.73,60.74 43.97,55.5 v54.61,55.5 | v32.86,60.74 23.97,60.74 v3.97,60.74